# EAGLE board m7103_ (EAGLE 4.11)
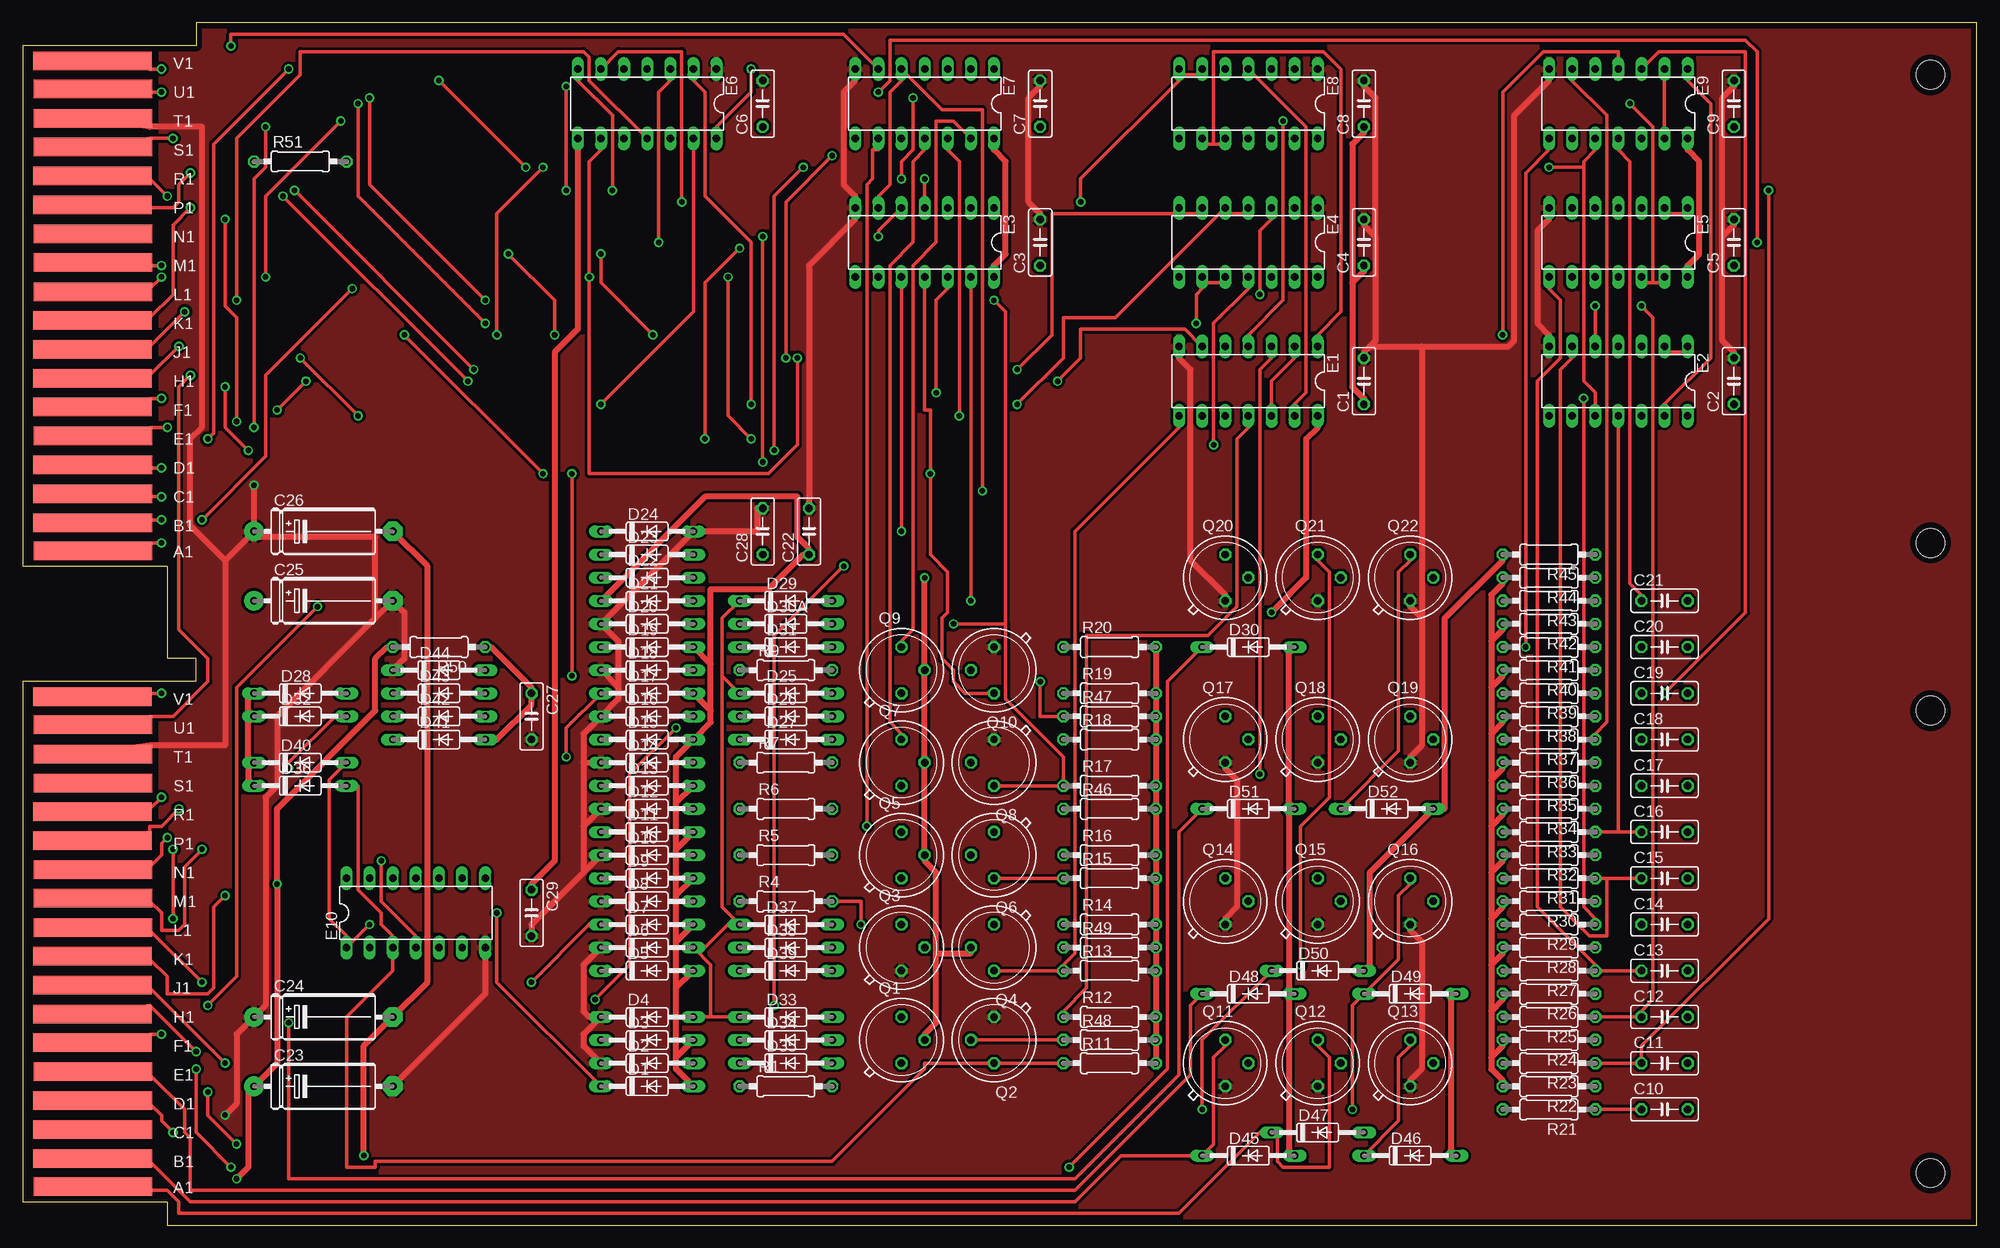
[diagram p0: board, top side]
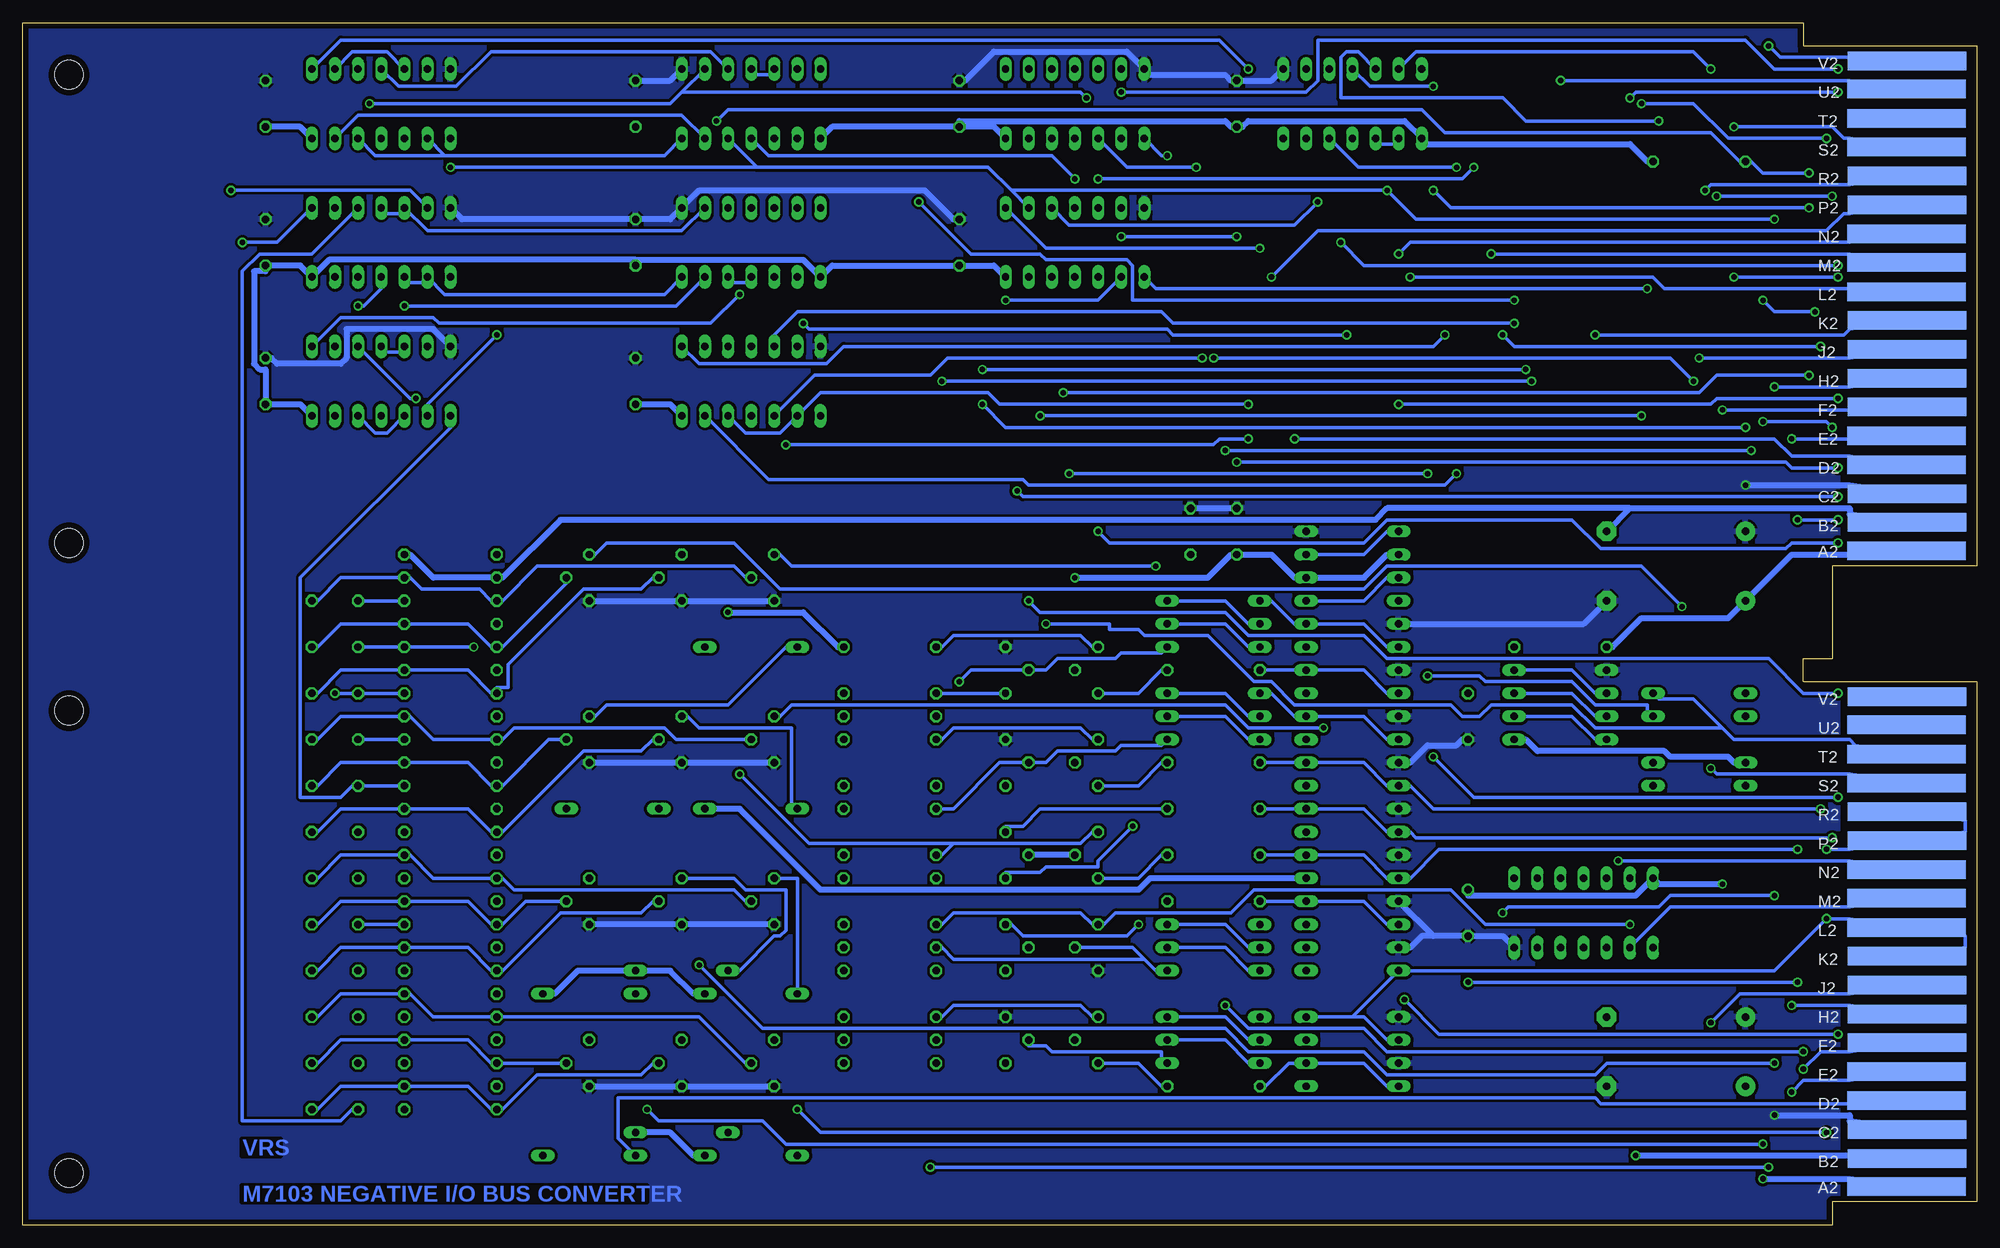
[diagram p1: board, bottom side, seen from below]

Size 214.63 x 132.08 mm. Coordinates in mm from the lower left corner, seen from the top.
Copper layers (1*16): Top 0.035mm / dielectric 1.5mm / Bottom 0.035mm
Design rules "15mils": minimum track width 15mil, minimum drill 24mil, track to track 12mil, track to pad 10mil, pad to pad 10mil, via to via 10mil, smd to smd 10mil, copper to edge 25mil, drill to drill 10mil, minimum pad ring 10mil, minimum via ring 8mil, stop-mask expansion 0mil, vias tented up to drill 0mil, thermal gap 10mil
Net classes: 1 Supply: width 0.635 mm

## Footprints (pad centres in the part's own frame; a part is rotated, then mirrored left to right if it is on the bottom)
C050-025X075 = drill 0.813 octagon: 1 -2.54,0; 2 2.54,0
E15-5 = drill 0.813 pad 2.159 round: + -7.62,0 | drill 0.813 pad 2.159 octagon: - 7.62,0
DO35-10 = drill 0.813 long: A 5.08,0; C -5.08,0
DIL14 = drill 0.813 long: 1 -7.62,-3.81; 2 -5.08,-3.81; 3 -2.54,-3.81; 4 0,-3.81; 5 2.54,-3.81; 6 5.08,-3.81; 7 7.62,-3.81; 8 7.62,3.81; 9 5.08,3.81; 10 2.54,3.81; 11 0,3.81; 12 -2.54,3.81; 13 -5.08,3.81; 14 -7.62,3.81
EDGE-CON4 = smd 13.017 x 2.032: AA1 7.709,4.207; AB1 7.684,7.312; AC1 7.684,10.474; AD1 7.684,13.665; AE1 7.693,16.84; AF1 7.668,20.041; AH1 7.668,23.19; AJ1 7.668,26.34; AK1 7.668,29.515; AL1 7.693,32.69; AM1 7.693,35.89; AN1 7.693,39.04; AP1 7.668,42.24; AR1 7.668,45.39; AS1 7.693,48.565; AT1 7.693,51.74; AU1 7.693,54.94; AV1 7.668,58.026; BA1 7.709,74.057; BB1 7.684,77.162; BC1 7.684,80.324; BD1 7.684,83.515; BE1 7.693,86.69; BF1 7.668,89.891; BH1 7.668,93.04; BJ1 7.668,96.19; BK1 7.668,99.365; BL1 7.693,102.54; BM1 7.693,105.74; BN1 7.693,108.89; BP1 7.668,112.09; BR1 7.668,115.24; BS1 7.693,118.415; BT1 7.693,121.59; BU1 7.693,124.79; BV1 7.668,127.876 | smd 13.017 x 2.032 bottom: AA2 7.69,4.207; AB2 7.668,7.328; AC2 7.668,10.49; AD2 7.693,13.665; AE2 7.693,16.84; AF2 7.642,20.041; AH2 7.642,23.19; AJ2 7.668,26.34; AK2 7.668,29.515; AL2 7.693,32.69; AM2 7.693,35.89; AN2 7.693,39.04; AP2 7.668,42.24; AR2 7.668,45.39; AS2 7.693,48.565; AT2 7.693,51.74; AU2 7.693,54.966; AV2 7.668,58.026; BA2 7.69,74.057; BB2 7.668,77.178; BC2 7.668,80.34; BD2 7.693,83.515; BE2 7.693,86.69; BF2 7.642,89.891; BH2 7.642,93.04; BJ2 7.668,96.19; BK2 7.668,99.365; BL2 7.693,102.54; BM2 7.693,105.74; BN2 7.693,108.89; BP2 7.668,112.09; BR2 7.668,115.24; BS2 7.693,118.415; BT2 7.693,121.59; BU2 7.693,124.816; BV2 7.668,127.876
TO39 = drill 0.813 octagon: 1 0,-2.54; 2 2.54,0; 3 0,2.54
0207/10 = drill 0.813 octagon: 1 -5.08,0; 2 5.08,0
DOUBLE-LONG = hole 3.175: 209.55,56.515; 209.55,5.715; 209.55,74.93; 209.55,126.365

## Placement (x,y rotation side)
C1  .01uf  [C050-025X075]  147.32,92.71 90 top
C2  .01uf  [C050-025X075]  187.96,92.71 90 top
C3  .01uf  [C050-025X075]  111.76,107.95 90 top
C4  .01uf  [C050-025X075]  147.32,107.95 90 top
C5  .01uf  [C050-025X075]  187.96,107.95 90 top
C6  .01uf  [C050-025X075]  81.28,123.19 90 top
C7  .01uf  [C050-025X075]  111.76,123.19 90 top
C8  .01uf  [C050-025X075]  147.32,123.19 90 top
C9  .01uf  [C050-025X075]  187.96,123.19 90 top
C10  15pf  [C050-025X075]  180.34,12.7 0 top
C11  15pf  [C050-025X075]  180.34,17.78 0 top
C12  15pf  [C050-025X075]  180.34,22.86 0 top
C13  15pf  [C050-025X075]  180.34,27.94 0 top
C14  15pf  [C050-025X075]  180.34,33.02 0 top
C15  15pf  [C050-025X075]  180.34,38.1 0 top
C16  15pf  [C050-025X075]  180.34,43.18 0 top
C17  15pf  [C050-025X075]  180.34,48.26 0 top
C18  15pf  [C050-025X075]  180.34,53.34 0 top
C19  15pf  [C050-025X075]  180.34,58.42 0 top
C20  15pf  [C050-025X075]  180.34,63.5 0 top
C21  15pf  [C050-025X075]  180.34,68.58 0 top
C22  .01uf  [C050-025X075]  86.36,76.2 90 top
C23  6.8uf  [E15-5]  33.02,15.24 0 top
C24  6.8uf  [E15-5]  33.02,22.86 0 top
C25  6.8uf  [E15-5]  33.02,68.58 0 top
C26  6.8uf  [E15-5]  33.02,76.2 0 top
C27  .01uf  [C050-025X075]  55.88,55.88 270 top
C28  .01uf  [C050-025X075]  81.28,76.2 90 top
C29  .01uf  [C050-025X075]  55.88,34.29 270 top
D1  D664  [DO35-10]  68.58,15.24 0 top
D2  D664  [DO35-10]  68.58,17.78 0 top
D3  D664  [DO35-10]  68.58,20.32 0 top
D4  D664  [DO35-10]  68.58,22.86 0 top
D5  D664  [DO35-10]  68.58,27.94 0 top
D6  D664  [DO35-10]  68.58,30.48 0 top
D7  D664  [DO35-10]  68.58,33.02 0 top
D8  D664  [DO35-10]  68.58,35.56 0 top
D9  D664  [DO35-10]  68.58,38.1 0 top
D10  D664  [DO35-10]  68.58,40.64 0 top
D11  D664  [DO35-10]  68.58,43.18 0 top
D12  D664  [DO35-10]  68.58,45.72 0 top
D13  D664  [DO35-10]  68.58,48.26 0 top
D14  D664  [DO35-10]  68.58,50.8 0 top
D15  D664  [DO35-10]  68.58,53.34 0 top
D16  D664  [DO35-10]  68.58,55.88 0 top
D17  D664  [DO35-10]  68.58,58.42 0 top
D18  D664  [DO35-10]  68.58,60.96 0 top
D19  D664  [DO35-10]  68.58,63.5 0 top
D20  D664  [DO35-10]  68.58,66.04 0 top
D21  D662  [DO35-10]  68.58,68.58 0 top
D22  D662  [DO35-10]  68.58,71.12 0 top
D23  D662  [DO35-10]  68.58,73.66 0 top
D24  D662  [DO35-10]  68.58,76.2 0 top
D25  D664  [DO35-10]  83.82,58.42 0 top
D26  D664  [DO35-10]  83.82,55.88 0 top
D27  D664  [DO35-10]  83.82,53.34 0 top
D28  D664  [DO35-10]  30.48,58.42 0 top
D29  D664  [DO35-10]  83.82,68.58 0 top
D30  D664  [DO35-10]  134.62,63.5 0 top
D30A  D664  [DO35-10]  83.82,66.04 0 top
D31  D664  [DO35-10]  83.82,63.5 0 top
D32  D664  [DO35-10]  30.48,55.88 0 top
D33  D664  [DO35-10]  83.82,22.86 0 top
D34  D664  [DO35-10]  83.82,20.32 0 top
D35  D664  [DO35-10]  83.82,17.78 0 top
D36  D664  [DO35-10]  30.48,48.26 0 top
D37  D664  [DO35-10]  83.82,33.02 0 top
D38  D664  [DO35-10]  83.82,30.48 0 top
D39  D664  [DO35-10]  83.82,27.94 0 top
D40  D664  [DO35-10]  30.48,50.8 0 top
D41  D662  [DO35-10]  45.72,53.34 0 top
D42  D662  [DO35-10]  45.72,55.88 0 top
D43  D662  [DO35-10]  45.72,58.42 0 top
D44  D662  [DO35-10]  45.72,60.96 0 top
D45  D664  [DO35-10]  134.62,7.62 0 top
D46  D664  [DO35-10]  152.4,7.62 0 top
D47  D664  [DO35-10]  142.24,10.16 0 top
D48  D664  [DO35-10]  134.62,25.4 0 top
D49  D664  [DO35-10]  152.4,25.4 0 top
D50  D664  [DO35-10]  142.24,27.94 0 top
D51  D664  [DO35-10]  134.62,45.72 0 top
D52  D664  [DO35-10]  149.86,45.72 0 top
E1  DS8881N  [DIL14]  134.62,92.71 180 top
E2  7400N  [DIL14]  175.26,92.71 180 top
E3  74H04N  [DIL14]  99.06,107.95 180 top
E4  SP380N  [DIL14]  134.62,107.95 180 top
E5  7400N  [DIL14]  175.26,107.95 180 top
E6  SP380N  [DIL14]  68.58,123.19 180 top
E7  7416N  [DIL14]  99.06,123.19 180 top
E8  SP380N  [DIL14]  134.62,123.19 180 top
E9  7400N  [DIL14]  175.26,123.19 180 top
E10  74H04N  [DIL14]  43.18,34.29 0 top
EDGE  [EDGE-CON4]  0,0 0 top
Q1  2N3009B  [TO39]  96.52,20.32 0 top
Q2  2N3009B  [TO39]  106.68,20.32 180 top
Q3  2N3009B  [TO39]  96.52,30.48 0 top
Q4  2N3009B  [TO39]  106.68,30.48 180 top
Q5  2N3009B  [TO39]  96.52,40.64 0 top
Q6  2N3009B  [TO39]  106.68,40.64 180 top
Q7  2N3009B  [TO39]  96.52,50.8 0 top
Q8  2N3009B  [TO39]  106.68,50.8 180 top
Q9  2N3009B  [TO39]  96.52,60.96 0 top
Q10  2N3009B  [TO39]  106.68,60.96 180 top
Q11  2N3639B  [TO39]  132.08,17.78 0 top
Q12  2N3639B  [TO39]  142.24,17.78 0 top
Q13  2N3639B  [TO39]  152.4,17.78 0 top
Q14  2N3639B  [TO39]  132.08,35.56 0 top
Q15  2N3639B  [TO39]  142.24,35.56 0 top
Q16  2N3639B  [TO39]  152.4,35.56 0 top
Q17  2N3639B  [TO39]  132.08,53.34 0 top
Q18  2N3639B  [TO39]  142.24,53.34 0 top
Q19  2N3639B  [TO39]  152.4,53.34 0 top
Q20  2N3639B  [TO39]  132.08,71.12 0 top
Q21  2N3639B  [TO39]  142.24,71.12 0 top
Q22  2N3639B  [TO39]  152.4,71.12 0 top
R1  470  [0207/10]  83.82,15.24 0 top
R4  470  [0207/10]  83.82,35.56 0 top
R5  470  [0207/10]  83.82,40.64 0 top
R6  470  [0207/10]  83.82,45.72 0 top
R7  470  [0207/10]  83.82,50.8 0 top
R9  470  [0207/10]  83.82,60.96 0 top
R11  470  [0207/10]  119.38,17.78 0 top
R12  4.7K  [0207/10]  119.38,22.86 0 top
R13  4.7K  [0207/10]  119.38,27.94 0 top
R14  470  [0207/10]  119.38,33.02 0 top
R15  4.7K  [0207/10]  119.38,38.1 0 top
R16  4.7K  [0207/10]  119.38,40.64 0 top
R17  470  [0207/10]  119.38,48.26 0 top
R18  4.7K  [0207/10]  119.38,53.34 0 top
R19  470  [0207/10]  119.38,58.42 0 top
R20  4.7K  [0207/10]  119.38,63.5 0 top
R21  1K  [0207/10]  167.64,12.7 180 top
R22  5.6K  [0207/10]  167.64,15.24 180 top
R23  1K  [0207/10]  167.64,17.78 180 top
R24  5.6K  [0207/10]  167.64,20.32 180 top
R25  1K  [0207/10]  167.64,22.86 180 top
R26  5.6K  [0207/10]  167.64,25.4 180 top
R27  1K  [0207/10]  167.64,27.94 180 top
R28  5.6K  [0207/10]  167.64,30.48 180 top
R29  1K  [0207/10]  167.64,33.02 180 top
R30  5.6K  [0207/10]  167.64,35.56 180 top
R31  1K  [0207/10]  167.64,38.1 180 top
R32  5.6K  [0207/10]  167.64,40.64 180 top
R33  1K  [0207/10]  167.64,43.18 180 top
R34  5.6K  [0207/10]  167.64,45.72 180 top
R35  1K  [0207/10]  167.64,48.26 180 top
R36  5.6K  [0207/10]  167.64,50.8 180 top
R37  1K  [0207/10]  167.64,53.34 180 top
R38  5.6K  [0207/10]  167.64,55.88 180 top
R39  1K  [0207/10]  167.64,58.42 180 top
R40  5.6K  [0207/10]  167.64,60.96 180 top
R41  1K  [0207/10]  167.64,63.5 180 top
R42  5.6K  [0207/10]  167.64,66.04 180 top
R43  1K  [0207/10]  167.64,68.58 180 top
R44  5.6K  [0207/10]  167.64,71.12 180 top
R45  1K  [0207/10]  167.64,73.66 180 top
R46  4.7K  [0207/10]  119.38,45.72 0 top
R47  4.7K  [0207/10]  119.38,55.88 0 top
R48  4.7K  [0207/10]  119.38,20.32 0 top
R49  4.7K  [0207/10]  119.38,30.48 0 top
R50  220  [0207/10]  45.72,63.5 180 top
R51  3.3K  [0207/10]  30.48,116.84 0 top
U$3  OUTLINE-DOUBLE-LONG  [DOUBLE-LONG]  0,0 0 top

## Library data of the parts
C1-C29 R1 R4-R7 R9 R11-R51 = rcl
D1-D30 D30A D31-D52 = diode
E1 E4 E6 E8 EDGE U$3 = dec-con
E2 E3 E5 E7 E9 E10 = 74xx-jameco
Q1-Q10 = transistor-npn
Q11-Q22 = transistor-pnp

## Nets
+3V [Supply]: C27.1 D28.C D32.C D36.C D40.C D41.A R50.1
-1.5V [Supply]: C28.1 D22.A D23.C Q1.2 Q4.2 Q5.2 Q6.2 Q7.2 Q9.2
-3V [Supply]: C22.1 D1.A D3.A D5.A D7.A D9.A D11.A D13.A D15.A D17.A D19.A D21.C D30.A D45.A D46.A D47.A D48.A D49.A D50.A D51.A D52.A R45.2
-15V [Supply]: C24.- C26.- EDGE.AB2 EDGE.BB2 R22.2 R24.2 R26.2 R28.2 R30.2 R32.2 R34.2 R36.2 R38.2 R40.2 R42.2 R44.2 R45.1
AK1: D1.C D2.A EDGE.AK1 R1.1
AL1: D7.C D8.A EDGE.AL1 R4.1
AM1: D9.C D10.A EDGE.AM1 R5.1
AN1: D11.C D12.A EDGE.AN1 R6.1
AP1: D13.C D14.A EDGE.AP1 R7.1
AR1: D17.C D18.A EDGE.AR1 R9.1
BAC2D: E1.2 E1.9 E1.12 E6.2
BD2: E3.1 EDGE.BD2
BE2: E3.3 E6.6 EDGE.BE2
D2AC: E8.13 E9.2 E9.5 E9.13
D2DATA: E2.10 E2.12 E3.2 E6.7 E8.12 E9.10 EDGE.BE1
GND [Supply]: C1.2 C2.2 C3.2 C4.2 C5.2 C6.2 C7.2 C8.2 C9.2 C22.2 C23.- C24.+ C25.- C26.+ C27.2 C28.2 C29.2 D2.C D4.C D6.C D8.C D10.C D12.C D14.C D16.C D18.C D20.C D24.A D44.C E1.7 E2.7 E3.7 E4.1 E5.7 E6.1 E7.7 E8.1 E9.7 E10.7 EDGE.AC2 EDGE.AT1 EDGE.BC2 EDGE.BT1 Q2.1 Q3.1 Q8.1 Q10.1 Q11.1 Q12.1 Q13.1 Q14.1 Q15.1 Q16.1 Q17.1 Q18.1 Q19.1 Q20.1 Q21.1 Q22.1
N$1: Q4.1 R4.2
N$2: E1.8 Q4.3 R13.1
N$3: Q1.1 R1.2
N$4: Q5.1 R5.2
N$5: E1.11 Q1.3 R12.1
N$6: E1.3 Q5.3 R16.1
N$7: Q6.1 R6.2
N$8: E7.9 Q6.3 R15.1
N$9: Q7.1 R7.2
N$10: E7.11 Q7.3 R18.1
N$11: Q9.1 R9.2
N$12: E7.13 Q9.3 R20.1
N$13: E3.4 E8.11
N$14: D3.C D4.A D5.C D6.A D15.C D16.A D19.C D20.A D25.C D29.C D33.C D37.C EDGE.AK2 EDGE.AL2 EDGE.AP2 EDGE.AR2
N$15: E1.1 E8.9 E8.10 EDGE.BM2
N$16: E1.10 E6.9 E6.10 EDGE.BL2
N$17: E1.13 E8.4 E8.5 EDGE.BK2
N$18: E7.12 EDGE.BJ2
N$19: E7.10 EDGE.BH2
N$20: E7.8 EDGE.BF2
N$21: E2.9 E8.3 E9.4
N$22: E2.13 E6.14 E9.1
N$23: E8.14 E9.9 E9.12
N$24: D27.A Q8.2 R46.1
N$25: D25.A D26.C
N$26: C18.1 E9.6 R37.1
N$27: C18.2 Q17.2 R37.2 R38.1
N$28: EDGE.AF1 Q17.3
N$29: C17.1 E2.8 R35.1
N$30: C17.2 Q19.2 R35.2 R36.1
N$31: D30.C EDGE.AF2 Q19.3
N$32: C12.1 E5.11 R25.1
N$33: C12.2 Q11.2 R25.2 R26.1
N$34: D45.C EDGE.AB1 Q11.3
N$35: C13.1 E5.8 R27.1
N$36: C13.2 Q15.2 R27.2 R28.1
N$37: D50.C EDGE.AD1 Q15.3
N$38: E5.12 E5.13 E8.2 EDGE.BU2
N$39: E4.14 E5.9 E5.10
N$40: E8.6 E8.7 EDGE.BU1
N$41: E4.9 E4.10 EDGE.BN2
N$42: C19.1 E9.3 R39.1
N$43: C19.2 Q21.2 R39.2 R40.1
N$44: EDGE.AJ1 Q21.3
N$45: C16.1 E2.11 R33.1
N$46: C16.2 Q18.2 R33.2 R34.1
N$47: D51.C EDGE.AJ2 Q18.3
N$48: C21.1 E9.11 R43.1
N$49: C21.2 Q20.2 R43.2 R44.1
N$50: EDGE.AH1 Q20.3
N$51: C20.1 E9.8 R41.1
N$52: C20.2 Q22.2 R41.2 R42.1
N$53: D52.C EDGE.AH2 Q22.3
N$54: C15.1 E2.6 R31.1
N$55: C15.2 Q14.2 R31.2 R32.1
N$56: D48.C EDGE.AE1 Q14.3
N$57: C11.1 E5.6 R23.1
N$58: C11.2 Q13.2 R23.2 R24.1
N$59: D46.C EDGE.AD2 Q13.3
N$60: C14.1 E2.3 R29.1
N$61: C14.2 Q16.2 R29.2 R30.1
N$62: D49.C EDGE.AE2 Q16.3
N$63: C10.1 E5.3 R21.1
N$64: C10.2 Q12.2 R21.2 R22.1
N$65: D47.C EDGE.AA1 Q12.3
N$66: E2.4 E2.5 E4.13
N$67: E4.2 E5.4 E5.5
N$68: E5.1 E5.2 EDGE.BV1
N$69: E2.1 E2.2 E4.3
N$70: E4.4 E4.5 EDGE.BS2
N$71: E4.6 E4.7 EDGE.BR2
N$72: E4.11 E4.12 EDGE.BP2
N$73: D26.A D27.C
N$74: D28.A E3.9 EDGE.AT2 Q8.3 R17.1
N$75: D31.A Q10.2 R47.1
N$76: D29.A D30A.C
N$77: D30A.A D31.C
N$78: D32.A E3.11 EDGE.AS2 Q10.3 R19.1
N$79: D35.A Q2.2 R48.1
N$80: D33.A D34.C
N$81: D34.A D35.C
N$82: D36.A E10.3 Q2.3 R11.1
N$83: D39.A Q3.2 R49.1
N$84: D37.A D38.C
N$85: D38.A D39.C
N$86: D40.A E10.1 Q3.3 R14.1
N$87: E10.4 EDGE.AN2
N$88: E3.8 EDGE.BB1
N$89: E3.10 EDGE.BA1
N$90: E10.2 EDGE.AM2
N$91: E6.5 EDGE.BL1
N$92: E6.4 EDGE.BK1
N$93: E6.3 EDGE.BM1
N$94: E6.13 EDGE.BF1
N$95: E6.12 EDGE.BH1
N$96: E6.11 EDGE.BJ1
N$97: E1.5 EDGE.BS1
N$98: E1.6 EDGE.BR1
N$99: E1.4 EDGE.BP1 R51.1
N$100: E3.6 E7.5 EDGE.BC1
N$101: E3.5 EDGE.BD1
N$102: E3.13 EDGE.AV1
N$103: E3.12 EDGE.AU1
N$104: E7.6 EDGE.BV2
N$105: D23.A D24.C
N$107: D41.C D42.A
N$108: D42.C D43.A
N$109: D43.C D44.A
N$110: D21.A D22.C
VCC [Supply]: C1.1 C2.1 C3.1 C4.1 C5.1 C6.1 C7.1 C8.1 C9.1 C23.+ C25.+ C29.1 E1.14 E2.14 E3.14 E4.8 E5.14 E6.8 E7.14 E8.8 E9.14 E10.14 EDGE.AA2 EDGE.BA2 R11.2 R12.2 R13.2 R14.2 R15.2 R16.2 R17.2 R18.2 R19.2 R20.2 R46.2 R47.2 R48.2 R49.2 R50.2 R51.2

## Tracks (layer width: path | path; a pad name or v marks a point on that pad's centre or on a via)
+3V
  Top 0.635: D36.C 24.77,48.9 24.77,50.16 D40.C 24.77,51.44 24.77,55.24 D32.C 24.77,56.52 24.77,57.78 D28.C | D41.A 52.07,53.34 55.88,57.15 C27.1 55.88,59.05 51.44,63.5 R50.1
  Bottom 0.635: D40.C 26.67,50.8 27.31,51.44 33.66,51.44 34.29,52.07 48.26,52.07 49.53,53.34 D41.A
-1.5V  (via drill 0.61)
  Top 0.635: 100.33,29.84 100.33,22.23 99.06,20.95 Q1.2 | 100.33,29.84 100.33,38.73 99.06,40.01 Q5.2 Q7.2 Q9.2 v99.06,71.12 | 100.33,29.84 104.14,29.84 Q4.2
  Bottom 0.635: D23.C 64.77,73.66 67.31,71.12 D22.A 74.93,71.12 77.47,73.66 C28.1 81.92,73.66 84.46,71.12 v99.06,71.12 | Q5.2 Q6.2
-3V
  Top 0.635: D21.C 74.93,80.01 85.09,80.01 85.09,75.56 86.36,74.3 C22.1 85.73,73.66 81.92,69.85 75.57,69.85 75.57,61.59 | 71.76,18.41 71.76,17.14 D1.A | 71.76,18.41 D3.A | 71.76,18.41 71.76,26.04 | 71.76,26.04 D5.A | 71.76,26.04 71.76,31.11 | 71.76,31.11 D7.A | 71.76,31.11 71.76,36.2 | 71.76,36.2 D9.A | 71.76,36.2 71.76,41.27 | 71.76,41.27 D11.A | 71.76,41.27 71.76,46.35 | 71.76,46.35 D13.A | 71.76,46.35 71.76,51.44 D15.A 75.57,55.24 75.57,56.52 | 75.57,56.52 D17.A | 75.57,56.52 75.57,61.59 | 75.57,61.59 D19.A | D46.A 156.85,8.26 156.85,24.77 D49.A | D30.A 139.07,62.87 139.07,46.35 D51.A 139.07,45.09 139.07,26.04 D48.A 139.07,24.77 139.07,8.26 D45.A | D50.A 147.96,28.57 147.96,38.73 D52.A 156.21,45.72 156.21,66.67 162.56,73.03 R45.2
  Bottom 0.635: D45.A 140.97,7.62 143.51,10.16 D47.A | D48.A 140.97,25.4 143.51,27.94 D50.A 153.67,27.94 156.21,25.4 D49.A | D9.A 90.81,38.1 92.08,36.83 127,36.83 135.89,45.72 D51.A
-15V  (via drill 0.61)
  Top 0.635: 161.29,18.41 161.29,17.14 162.56,15.88 R22.2 | 161.29,18.41 162.56,19.68 R24.2 | 161.29,23.5 162.56,24.77 R26.2 | 161.29,23.5 161.29,18.41 | 161.29,28.57 162.56,29.84 R28.2 | 161.29,28.57 161.29,23.5 | 161.29,33.66 162.56,34.92 R30.2 | 161.29,33.66 161.29,28.57 | 161.29,38.73 162.56,40.01 R32.2 | 161.29,38.73 161.29,33.66 | 161.29,43.81 162.56,45.09 R34.2 | 161.29,43.81 161.29,38.73 | 161.29,48.9 162.56,50.16 R36.2 | 161.29,48.9 161.29,43.81 | 161.29,53.98 162.56,55.24 R38.2 | 161.29,53.98 161.29,48.9 | 161.29,59.05 162.56,60.33 R40.2 | 161.29,59.05 161.29,53.98 | 161.29,64.14 162.56,65.41 R42.2 | 161.29,64.14 161.29,59.05 | 161.29,64.14 161.29,69.22 162.56,70.48 R44.2 | C26.- 44.45,72.39 44.45,26.67 C24.- 37.47,19.68 v37.47,7.62
  Bottom 0.635: R45.1 172.09,73.66 169.55,71.12 R44.2 161.93,71.12 155.58,77.47 66.04,77.47 64.77,78.74 38.1,78.74 | v37.47,7.62 13.97,7.62 EDGE.AB2 | 38.1,78.74 13.97,78.74 13.97,78.11 EDGE.BB2 | C26.- 38.1,78.74
AK1  (via drill 0.61)
  Top 0.381: v52.07,34.29 52.07,26.67 D1.C | v22.23,36.2 20.96,34.92 20.96,26.04 20.32,25.4 15.88,25.4 15.88,27.3 13.97,29.21 EDGE.AK1
  Bottom 0.381: D1.C 64.77,15.24 67.31,17.78 D2.A 75.57,17.78 78.11,15.24 R1.1 | v52.07,34.29 51.44,34.92 34.93,34.92 33.66,36.2 v22.23,36.2
AL1  (via drill 0.61)
  Top 0.381: v55.88,26.67 62.23,33.02 D7.C | v19.69,26.67 13.97,32.38 EDGE.AL1
  Bottom 0.381: D7.C 64.77,33.02 67.31,35.56 D8.A R4.1 | v19.69,26.67 v55.88,26.67
AM1  (via drill 0.61)
  Top 0.381: v19.69,41.27 17.78,39.37 17.78,33.02 17.15,32.38 15.24,32.38 15.24,34.29 13.97,35.56 EDGE.AM1
  Bottom 0.381: R5.1 D10.A 67.31,40.64 64.77,38.1 D9.C 62.23,38.1 59.06,41.27 v19.69,41.27
AN1  (via drill 0.61)
  Top 0.381: v15.88,42.55 15.24,41.91 15.24,40.64 13.97,39.37 EDGE.AN1
  Bottom 0.381: R6.1 D12.A 67.31,45.72 64.77,43.18 D11.C 62.23,43.18 61.6,42.55 v15.88,42.55
AP1  (via drill 0.61)
  Top 0.381: v17.15,45.72 15.24,43.81 13.97,43.81 13.97,43.18 EDGE.AP1
  Bottom 0.381: R7.1 D14.A 67.31,50.8 64.77,48.26 D13.C 62.23,48.26 59.69,45.72 v17.15,45.72
AR1  (via drill 0.61)
  Top 0.381: v59.69,51.44 59.69,54.61 D17.C | v15.24,46.99 13.97,45.72 EDGE.AR1
  Bottom 0.381: D17.C 64.77,58.42 67.31,60.96 D18.A R9.1 | v59.69,51.44 55.25,46.99 v15.24,46.99
BAC2D  (via drill 0.61)
  Top 0.381: v80.01,90.17 80.01,107.95 74.93,113.03 74.93,124.46 73.66,125.73 E6.2 | E1.2 139.7,95.25 137.16,92.71 E1.12
  Bottom 0.381: E1.12 135.26,87 131.45,87 E1.9 127,91.44 108.59,91.44 107.32,90.17 v80.01,90.17
BD2  (via drill 0.61)
  Top 0.381: v78.74,107.31 74.93,103.5 v74.93,86.36
  Bottom 0.381: v78.74,107.31 102.24,107.31 E3.1 | v74.93,86.36 22.23,86.36 20.32,84.45 13.97,84.45 EDGE.BD2
BE2  (via drill 0.61)
  Top 0.381: v72.39,112.39 72.39,128.91 65.41,128.91 E6.6 | v20.32,86.36 20.96,87 20.96,118.75 v29.21,127
  Bottom 0.381: v72.39,112.39 74.93,109.86 99.7,109.86 E3.3 | v20.32,86.36 13.97,86.36 EDGE.BE2 | v29.21,127 31.12,128.91 61.6,128.91 E6.6
D2AC
  Top 0.381: E9.13 E9.2
  Bottom 0.381: E9.5 174.63,128.91 178.44,128.91 E9.2 | E8.13 142.24,121.92 177.8,121.92 E9.13
D2DATA  (via drill 0.61)
  Top 0.381: 171.45,116.2 171.45,92.71 172.72,91.44 E2.10 | 171.45,116.2 171.45,116.84 172.72,118.11 E9.10 | v64.77,113.67 64.77,121.92 60.96,125.73 E6.7 | v15.88,87.63 13.97,87.63 EDGE.BE1 | v23.5,88.27 23.5,99.69 22.23,100.97 v22.23,110.49 | v167.64,116.2 171.45,116.2
  Bottom 0.381: E2.10 174.63,87 175.9,87 E2.12 | 106.05,113.67 108.59,116.2 133.99,116.2 | 106.05,113.67 E3.2 | E8.12 133.99,116.2 | 106.05,113.67 v64.77,113.67 61.6,110.49 v22.23,110.49 | v15.88,87.63 16.51,88.27 v23.5,88.27 | 133.99,116.2 v167.64,116.2
GND  (via drill 0.61)
  Top 0.635: 186.69,108.58 186.69,97.16 187.96,95.89 C2.2 | 186.69,108.58 187.96,109.86 C5.2 | 186.69,108.58 186.69,123.83 187.96,125.09 C9.2 | E2.7 167.64,97.79 166.37,99.06 166.37,109.22 167.64,110.49 E5.7 | 147.96,96.52 148.59,97.16 148.59,108.58 | 147.96,96.52 147.32,95.89 C1.2 | 148.59,108.58 147.32,109.86 C4.2 | 147.96,96.52 153.67,96.52 | 153.67,96.52 163.2,96.52 163.83,97.16 163.83,121.92 167.64,125.73 E9.7 | 148.59,108.58 148.59,123.83 147.32,125.09 C8.2 | E1.7 127,95.25 128.27,93.98 128.27,73.03 132.08,69.22 Q20.1 | 153.67,66.67 153.67,52.7 152.4,51.44 Q19.1 | 153.67,66.67 152.4,67.94 Q22.1 | Q16.1 152.4,32.38 153.67,31.11 153.67,17.14 152.4,15.88 Q13.1 | Q17.1 132.08,50.16 133.35,48.9 133.35,34.92 132.08,33.66 Q14.1 | 153.67,96.52 153.67,66.67 | D44.C 41.91,62.23 41.91,67.31 C25.- 38.74,66.67 | 38.74,66.67 27.94,55.88 27.94,48.26 26.67,46.99 26.67,24.13 C24.+ 23.5,20.95 23.5,13.34 v22.23,12.06 | 38.74,66.67 38.74,75.56 26.04,75.56 C26.+ | 22.23,73.03 22.23,52.7 13.97,52.7 EDGE.AT1 | C26.+ 22.23,73.03 | C26.+ v25.4,81.28 | 22.23,73.03 18.42,76.83 18.42,86.36 19.69,87.63 19.69,120.65 13.97,120.65 EDGE.BT1 | C3.2 111.76,111.12 110.49,112.39 110.49,123.83 111.76,125.09 C7.2 | E7.7 91.44,125.73 90.17,124.46 90.17,114.3 91.44,113.03 E3.7 91.44,110.49 86.36,105.41 C22.2 | C28.2 80.65,78.74 80.65,76.2 D24.A D20.C 65.41,64.14 65.41,59.05 | D2.C 61.6,19.68 61.6,20.95 D4.C 62.23,22.86 61.6,23.5 61.6,28.57 D6.C | 61.6,38.73 55.88,33.02 C29.2 | 61.6,38.73 D10.C | 61.6,43.81 61.6,38.73 | 61.6,43.81 D12.C | 61.6,50.8 61.6,43.81 | 61.6,50.8 61.6,53.98 D16.C 65.41,57.78 65.41,59.05 | 65.41,59.05 D18.C
  Top 0.635: C23.- 50.8,25.4 E10.7 | 61.6,50.8 D14.C
  Bottom 0.635: E8.1 143.51,125.73 C8.2 | E5.7 166.37,110.49 C4.2 143.51,110.49 E4.1 140.34,113.67 115.57,113.67 112.4,110.49 C3.2 | C2.2 187.33,95.25 186.69,94.61 179.71,94.61 179.07,95.25 179.07,98.42 169.55,98.42 E2.7 | Q17.1 Q18.1 Q19.1 | Q20.1 Q21.1 Q22.1 | Q14.1 Q15.1 Q16.1 | Q11.1 Q12.1 Q13.1 | v22.23,12.06 13.97,12.06 13.97,11.43 EDGE.AC2 | v25.4,81.28 13.97,81.28 EDGE.BC2 | E6.1 77.47,125.73 C6.2 81.92,125.73 82.55,126.36 90.81,126.36 E7.7 93.35,128.91 107.95,128.91 111.13,125.73 C7.2 | C22.2 C28.2 | C27.2 56.52,53.34 57.15,52.7 60.33,52.7 62.23,50.8 D14.C | E10.7 52.07,31.75 C29.2 59.69,31.75 | 59.69,31.75 60.96,31.75 62.23,30.48 D6.C | 59.69,31.75 D8.C | C25.- 43.18,66.04 D20.C
  pour Bottom (isolate 0.305): 15.24,0 15.24,132.08 214.63,132.08 214.63,0
  pour Top (isolate 0.305): 15.24,0 15.24,132.08 214.63,132.08 214.63,0
N$1  (via drill 0.61)
  Top 0.381: v92.08,33.02 92.08,35.56 R4.2
  Bottom 0.381: v92.08,33.02 93.35,31.75 104.78,31.75 106.05,33.02 Q4.1
N$2
  Top 0.381: E1.8 127,87.63 115.57,76.2 115.57,29.84 114.3,28.57 R13.1 Q4.3
N$3
  Bottom 0.381: R1.2 89.54,15.24 92.08,17.78 Q1.1
N$4
  Bottom 0.381: R5.2 89.54,40.64 92.08,38.1 Q5.1
N$5
  Top 0.381: E1.11 134.62,87.63 133.35,86.36 133.35,67.94 130.18,64.77 116.84,64.77 116.84,26.04 114.3,23.5 R12.1
  Bottom 0.381: Q1.3 97.16,22.86 98.43,24.13 112.4,24.13 113.67,22.86 R12.1
N$6  (via drill 0.61)
  Top 0.381: v135.89,49.53 135.89,93.98 137.16,95.25 E1.3
  Bottom 0.381: 112.4,41.91 98.43,41.91 97.16,43.18 Q5.3 | 112.4,41.91 113.67,40.64 R16.1 | v135.89,49.53 128.27,41.91 112.4,41.91
N$7
  Bottom 0.381: R6.2 102.87,45.72 104.78,43.81 106.68,43.81 Q6.1
N$8  (via drill 0.61)
  Top 0.381: Q6.3 R15.1 | v92.71,43.81 92.71,114.3 93.35,114.94 93.35,118.11 93.98,118.11 E7.9
  Bottom 0.381: v92.71,43.81 96.52,40.01 96.52,39.37 102.24,39.37 102.87,38.73 106.68,38.73 Q6.3
N$9
  Bottom 0.381: R7.2 89.54,50.8 92.08,48.26 Q7.1
N$10
  Top 0.381: E7.11 99.06,118.11 97.79,116.84 97.79,107.95 95.25,105.41 95.25,55.24 96.52,53.98 Q7.3
  Bottom 0.381: Q7.3 97.16,53.34 98.43,54.61 112.4,54.61 113.67,53.34 R18.1
N$11
  Bottom 0.381: R9.2 89.54,60.96 92.08,58.42 Q9.1
N$12
  Top 0.381: E7.13 102.24,121.28 100.33,121.28 100.33,107.95 97.79,105.41 97.79,65.41 96.52,64.14 Q9.3
  Bottom 0.381: Q9.3 97.16,63.5 98.43,64.77 112.4,64.77 113.67,63.5 R20.1
N$13  (via drill 0.61)
  Top 0.381: v99.06,114.94 E3.4
  Bottom 0.381: v99.06,114.94 101.6,117.47 132.72,117.47 E8.11
N$14  (via drill 0.61)
  Top 0.381: v16.51,33.66 v16.51,41.27 | 75.57,22.86 D33.C | D4.A 75.57,22.86 | 75.57,22.86 75.57,28.57 D6.A 74.93,30.48 77.47,33.02 D37.C 76.84,34.92 76.84,60.33 | 76.84,60.33 76.84,66.67 D29.C | 76.84,60.33 D25.C
  Bottom 0.381: EDGE.AR2 1.27,44.45 1.27,43.18 EDGE.AP2 13.97,41.27 v16.51,41.27 | EDGE.AK2 1.27,30.48 1.27,31.75 EDGE.AL2 13.97,33.66 v16.51,33.66 22.23,27.94 D5.C 68.58,22.86 | 68.58,22.86 67.31,22.86 64.77,20.32 D3.C | 68.58,22.86 D4.A | D15.C 64.77,53.34 67.31,55.88 D16.A 74.93,55.88 77.47,58.42 D25.C | D19.C 64.77,63.5 67.31,66.04 D20.A 74.93,66.04 77.47,68.58 D29.C
N$15  (via drill 0.61)
  Top 0.381: 130.81,118.75 131.45,118.75 E8.10 | 130.81,118.75 130.18,118.75 E8.9 | 130.81,118.75 130.81,128.91 142.88,128.91 144.78,127 144.78,100.33 142.24,97.79 E1.1 | v53.34,106.68 58.42,101.6 v58.42,97.79
  Bottom 0.381: v53.34,106.68 13.97,106.68 EDGE.BM2 | v58.42,97.79 59.69,96.52 124.46,96.52 126.37,94.61 140.34,94.61 E1.1
N$16  (via drill 0.61)
  Top 0.381: v85.09,95.25 85.09,85.72 81.92,82.55 62.23,82.55 v62.23,104.14 62.23,116.84 63.5,118.11 E6.9
  Bottom 0.381: E6.9 64.14,118.75 65.41,118.75 E6.10 | v85.09,95.25 113.03,95.25 114.94,93.34 127.64,93.34 E1.10 | v62.23,104.14 35.56,104.14 34.29,102.87 13.97,102.87 EDGE.BL2
N$17  (via drill 0.61)
  Top 0.381: E1.13 139.7,90.17 140.97,91.44 140.97,120.65 E8.4 | v57.15,82.55 v41.91,97.79
  Bottom 0.381: E8.5 132.72,126.36 133.99,126.36 E8.4 | v41.91,97.79 14.61,97.79 13.97,98.42 EDGE.BK2 | v57.15,82.55 58.42,81.28 104.14,81.28 104.78,81.92 132.72,81.92 E1.13
N$18  (via drill 0.61)
  Top 0.381: v102.87,88.9 102.87,116.84 101.6,118.11 E7.12 | v30.48,95.25 v36.83,88.9
  Bottom 0.381: v36.83,88.9 v102.87,88.9 | v30.48,95.25 13.97,95.25 EDGE.BJ2
N$19  (via drill 0.61)
  Top 0.381: v85.73,116.2 82.55,113.03 v82.55,85.09 | v24.77,85.09 22.23,87.63 v22.23,92.08
  Bottom 0.381: v85.73,116.2 93.35,116.2 E7.10 | v24.77,85.09 v82.55,85.09 | v22.23,92.08 13.97,92.08 EDGE.BH2
N$20  (via drill 0.61)
  Top 0.381: v88.9,117.47 83.82,112.39 v83.82,95.25 | v27.94,89.53 v31.12,92.71
  Bottom 0.381: v88.9,117.47 89.54,117.47 E7.8 | v83.82,95.25 33.66,95.25 v31.12,92.71 | v27.94,89.53 13.97,89.53 EDGE.BF2
N$21  (via drill 0.61)
  Top 0.381: v162.56,97.79 162.56,124.46 167.01,128.91 175.26,128.91 E9.4
  Bottom 0.381: v162.56,97.79 170.18,90.17 E2.9 | E8.3 139.07,128.91 163.2,128.91 167.01,125.09 173.36,125.09 E9.4
N$22  (via drill 0.61)
  Top 0.381: E2.13 180.34,90.17 185.42,95.25 185.42,123.19 182.88,125.73 E9.1 | v80.01,127 80.01,124.46 76.2,120.65 E6.14
  Bottom 0.381: v80.01,127 83.19,130.18 179.71,130.18 E9.1
N$23
  Bottom 0.381: 168.28,117.47 144.15,117.47 E8.14 | 168.28,117.47 E9.9 | 168.28,117.47 175.9,117.47 E9.12
N$24
  Bottom 0.381: D27.A 89.54,52.7 93.98,52.7 94.62,52.07 100.97,52.07 102.24,50.8 Q8.2 107.32,50.8 112.4,45.72 R46.1
N$25
  Bottom 0.381: D26.C 80.01,55.88 82.55,58.42 D25.A
N$26
  Top 0.381: E9.6 170.18,125.73 173.99,121.92 173.99,55.24 172.72,53.98 R37.1
  Bottom 0.381: R37.1 C18.1
N$27
  Bottom 0.381: Q17.2 142.88,53.34 144.15,54.61 160.66,54.61 161.93,53.34 R37.2 169.55,53.34 172.09,55.88 R38.1 179.71,55.88 182.25,53.34 C18.2
N$28  (via drill 0.61)
  Top 0.381: v71.76,54.61 66.68,49.53 66.68,28.57 v62.87,24.77 | v15.24,20.95 13.97,20.95 EDGE.AF1
  Bottom 0.381: v71.76,54.61 80.01,54.61 82.55,57.15 130.18,57.15 131.45,55.88 Q17.3 | v62.87,24.77 59.06,20.95 v15.24,20.95
N$29
  Bottom 0.381: R35.1 C17.1 178.44,48.26 179.71,46.99 184.15,46.99 184.15,71.12 167.64,87.63 E2.8
N$30
  Bottom 0.381: Q19.2 156.85,53.34 161.93,48.26 R35.2 163.2,48.26 165.74,50.8 R36.1 179.71,50.8 182.25,48.26 C17.2
N$31  (via drill 0.61)
  Top 0.381: v114.94,6.35 125.73,17.14 125.73,59.69 D30.C | v22.86,6.35 19.05,10.16 v19.05,17.14
  Bottom 0.381: D30.C 130.81,63.5 137.16,57.15 150.5,57.15 151.77,55.88 Q19.3 | v22.86,6.35 v114.94,6.35 | v19.05,17.14 17.15,19.05 13.97,19.05 EDGE.AF2
N$32  (via drill 0.61)
  Top 0.381: R25.1 C12.1 177.8,23.5 179.07,24.77 179.07,99.69 v177.8,100.97
  Bottom 0.381: v177.8,100.97 177.17,100.97 175.26,102.87 E5.11
N$33
  Bottom 0.381: Q11.2 135.26,17.78 140.34,22.86 R25.2 169.55,22.86 172.09,25.4 R26.1 179.71,25.4 182.25,22.86 C12.2
N$34
  Top 0.381: Q11.3 132.08,19.68 130.81,18.41 130.81,8.89 D45.C 120.65,7.62 115.57,2.54 18.42,2.54 13.97,6.99 EDGE.AB1
N$35
  Top 0.381: C13.1 R27.1 172.72,28.57 166.37,34.92 166.37,92.71 168.91,95.25 168.91,101.6 167.64,102.87 E5.8
N$36
  Bottom 0.381: C13.2 182.25,27.94 179.71,30.48 R28.1 165.74,30.48 163.2,27.94 R27.2 161.93,27.94 155.58,34.29 146.69,34.29 145.42,35.56 Q15.2
N$37  (via drill 0.61)
  Top 0.381: v129.54,12.7 129.54,20.32 D50.C | v16.51,10.16 15.24,11.43 15.24,12.06 13.97,13.34 EDGE.AD1
  Bottom 0.381: D50.C 135.89,27.94 132.08,31.75 131.45,31.75 130.81,32.38 130.81,36.83 135.26,36.83 136.53,38.1 Q15.3 | v129.54,12.7 127,10.16 v16.51,10.16
N$38  (via drill 0.61)
  Top 0.381: 179.07,103.5 179.71,103.5 E5.13 | 179.07,103.5 178.44,103.5 E5.12 | v176.53,123.19 179.07,120.65 179.07,103.5 | v55.25,116.2 v45.72,125.73 | v96.52,114.94 96.52,116.84 97.79,118.11 v97.79,123.83
  Bottom 0.381: 142.24,124.46 143.51,123.19 v176.53,123.19 | 142.24,124.46 E8.2 | v45.72,125.73 13.97,125.73 EDGE.BU2 | v55.25,116.2 56.52,114.94 v96.52,114.94 | v97.79,123.83 98.43,124.46 142.24,124.46
N$39
  Bottom 0.381: E4.14 144.15,102.23 168.28,102.23 E5.9 170.82,103.5 172.09,103.5 E5.10
N$40  (via drill 0.61)
  Top 0.381: E8.6 128.91,126.36 127.64,126.36 E8.7 127,125.73 116.21,114.94 v116.21,112.39 | v50.8,101.6 38.1,114.3 v38.1,123.83 | v15.24,124.46 13.97,124.46 EDGE.BU1
  Bottom 0.381: v116.21,112.39 110.49,106.68 102.87,106.68 102.24,106.05 93.35,106.05 92.71,105.41 92.71,101.6 v50.8,101.6 | v38.1,123.83 37.47,124.46 v15.24,124.46
N$41  (via drill 0.61)
  Top 0.381: E4.10 131.45,103.5 130.18,103.5 E4.9 129.54,102.87 128.91,102.23 v128.91,99.06 | v69.22,97.79 63.5,103.5 v63.5,106.68
  Bottom 0.381: v128.91,99.06 128.27,98.42 88.9,98.42 88.27,97.79 v69.22,97.79 | v63.5,106.68 62.23,107.95 13.97,107.95 EDGE.BN2
N$42  (via drill 0.61)
  Top 0.381: v180.34,58.42 189.23,67.31 189.23,128.91 179.71,128.91 E9.3
  Bottom 0.381: R39.1 C19.1 v180.34,58.42
N$43
  Bottom 0.381: C19.2 182.25,58.42 179.71,60.96 R40.1 165.74,60.96 163.2,58.42 R39.2 162.56,59.05 161.29,59.05 161.29,61.59 153.04,69.85 146.69,69.85 145.42,71.12 Q21.2
N$44  (via drill 0.61)
  Top 0.381: v140.34,28.57 140.34,43.81 143.51,46.99 143.51,71.75 142.24,73.03 Q21.3 | v22.23,17.78 13.97,26.04 EDGE.AJ1
  Bottom 0.381: v140.34,28.57 133.35,21.59 82.55,21.59 80.01,19.05 67.31,19.05 64.77,16.51 41.91,16.51 40.64,17.78 v22.23,17.78
N$45
  Top 0.381: 175.26,43.18 R33.1 | 175.26,43.18 C16.1 | E2.11 175.26,43.18
N$46
  Bottom 0.381: C16.2 182.25,43.18 179.71,45.72 R34.1 165.74,45.72 163.2,43.18 R33.2 161.93,43.18 153.04,52.07 146.69,52.07 145.42,53.34 Q18.2
N$47  (via drill 0.61)
  Top 0.381: v29.21,22.23 29.21,5.08 115.57,5.08 127,16.51 127,43.18 D51.C
  Bottom 0.381: D51.C 130.18,46.35 130.18,54.61 140.34,54.61 141.61,55.88 Q18.3 | v29.21,22.23 26.04,25.4 13.97,25.4 EDGE.AJ2
N$48
  Top 0.381: E9.11 175.26,118.11 176.53,116.84 176.53,70.48 177.8,69.22 C21.1
  Bottom 0.381: C21.1 R43.1
N$49
  Bottom 0.381: C21.2 182.25,68.58 179.71,71.12 R44.1 172.09,71.12 170.82,69.85 164.47,69.85 163.2,68.58 R43.2 161.93,68.58 158.12,72.39 136.53,72.39 135.26,71.12 Q20.2
N$50  (via drill 0.61)
  Top 0.381: v90.17,72.39 82.55,64.77 v82.55,24.13 | v19.05,19.05 13.97,24.13 EDGE.AH1
  Bottom 0.381: v90.17,72.39 130.18,72.39 131.45,73.66 Q20.3 | v82.55,24.13 80.01,21.59 67.31,21.59 64.77,19.05 v19.05,19.05
N$51  (via drill 0.61)
  Top 0.381: v165.1,63.5 165.1,115.57 167.64,118.11 E9.8
  Bottom 0.381: C20.1 R41.1 v165.1,63.5
N$52
  Bottom 0.381: C20.2 182.25,63.5 179.71,66.04 R42.1 165.74,66.04 163.2,63.5 R41.2 161.93,63.5 154.94,70.48 Q22.2
N$53  (via drill 0.61)
  Top 0.381: D52.C 151.13,52.07 151.13,71.75 152.4,73.03 Q22.3 | v20.32,24.13 23.5,27.3 23.5,59.05 v32.39,67.94
  Bottom 0.381: v20.32,24.13 13.97,24.13 EDGE.AH2 | v32.39,67.94 36.83,72.39 64.77,72.39 67.31,69.85 131.45,69.85 136.53,74.93 150.5,74.93 151.77,73.66 Q22.3
N$54
  Top 0.381: 173.99,38.1 R31.1 | 173.99,38.1 C15.1 | 173.99,38.1 173.99,31.75 172.09,31.75 168.91,34.92 168.91,93.98 170.18,95.25 E2.6
N$55
  Bottom 0.381: Q14.2 135.26,35.56 136.53,36.83 160.66,36.83 161.93,38.1 R31.2 169.55,38.1 172.09,40.64 R32.1 179.71,40.64 182.25,38.1 C15.2
N$56
  Top 0.381: D48.C 128.27,24.13 128.27,16.51 115.57,3.81 18.42,3.81 18.42,9.53 17.78,10.16 17.78,12.7 13.97,16.51 EDGE.AE1
  Bottom 0.381: D48.C 129.54,38.1 Q14.3
N$57  (via drill 0.61)
  Top 0.381: R23.1 C11.1 177.8,19.68 191.77,33.66 v191.77,113.67
  Bottom 0.381: v191.77,113.67 172.09,113.67 E5.6
N$58
  Bottom 0.381: Q13.2 R23.2 163.2,17.78 165.74,20.32 R24.1 179.71,20.32 182.25,17.78 C11.2
N$59
  Top 0.381: D46.C 151.13,11.43 151.13,18.41 152.4,19.68 Q13.3
  Bottom 0.381: D46.C 149.23,9.53 149.23,13.97 41.91,13.97 41.28,13.34 13.97,13.34 EDGE.AD2
N$60  (via drill 0.61)
  Top 0.381: v171.45,90.81 171.45,34.92 172.72,33.66 R29.1
  Bottom 0.381: R29.1 C14.1 | v171.45,90.81 172.09,90.81 E2.3
N$61
  Bottom 0.381: Q16.2 159.39,35.56 161.93,33.02 R29.2 163.2,33.02 165.74,35.56 R30.1 179.71,35.56 182.25,33.02 C14.2
N$62  (via drill 0.61)
  Top 0.381: Q16.3 152.4,37.47 151.13,36.2 151.13,29.21 D49.C 146.05,24.13 v146.05,12.7 | v23.5,8.89 20.32,12.06 v20.32,14.61
  Bottom 0.381: v146.05,12.7 144.78,11.43 133.35,11.43 130.81,8.89 v23.5,8.89 | v20.32,14.61 19.05,15.88 13.97,15.88 EDGE.AE2
N$63
  Top 0.381: C10.1 R21.1
  Bottom 0.381: E5.3 182.88,106.68 188.6,106.68 190.5,104.78 190.5,11.43 179.71,11.43 178.44,12.7 C10.1
N$64
  Bottom 0.381: C10.2 182.25,12.7 179.71,15.24 R22.1 165.74,15.24 163.2,12.7 R21.2 161.93,12.7 158.12,16.51 146.69,16.51 145.42,17.78 Q12.2
N$65
  Top 0.381: Q12.3 142.24,19.68 143.51,18.41 143.51,6.35 138.43,6.35 137.8,6.99 137.8,9.53 D47.C 135.89,10.16 127,1.27 17.15,1.27 17.15,2.54 15.88,3.81 13.97,3.81 EDGE.AA1
N$66  (via drill 0.61)
  Top 0.381: E2.5 v172.72,100.97
  Bottom 0.381: E2.5 173.36,95.89 174.63,95.89 E2.4 | v172.72,100.97 142.88,100.97 E4.13
N$67
  Bottom 0.381: E4.2 142.24,109.22 170.18,109.22 E5.5 173.36,111.12 174.63,111.12 E5.4
N$68  (via drill 0.61)
  Top 0.381: E5.2 180.98,111.12 182.25,111.12 E5.1 | v190.5,107.95 190.5,128.91 189.23,130.18 95.25,130.18 95.25,125.73 v93.98,124.46 | v15.24,127 13.97,127 EDGE.BV1
  Bottom 0.381: v190.5,107.95 186.69,107.95 E5.1 | v93.98,124.46 73.66,124.46 72.39,125.73 72.39,130.18 25.4,130.18 22.23,127 v15.24,127
N$69  (via drill 0.61)
  Top 0.381: E2.2 180.98,95.89 182.25,95.89 E2.1 | v135.89,102.23 135.89,109.22 137.16,110.49 E4.3
  Bottom 0.381: v135.89,102.23 139.07,99.06 168.91,99.06 169.55,99.69 179.71,99.69 E2.1
N$70  (via drill 0.61)
  Top 0.381: E4.4 133.99,111.12 132.72,111.12 E4.5 120.02,99.69 114.3,99.69 114.3,95.25 v109.22,90.17 | v25.4,87.63 25.4,114.94 26.67,116.2 v26.67,120.65
  Bottom 0.381: v109.22,90.17 106.68,87.63 v25.4,87.63 | v26.67,120.65 15.88,120.65 14.61,119.38 13.97,119.38 EDGE.BS2
N$71  (via drill 0.61)
  Top 0.381: E4.6 128.91,111.12 127.64,111.12 E4.7 126.37,111.12 113.03,111.12 113.03,97.79 v109.22,93.98 | v29.85,113.67 v49.53,93.98
  Bottom 0.381: v49.53,93.98 v109.22,93.98 | v29.85,113.67 29.21,114.3 13.97,114.3 EDGE.BR2
N$72  (via drill 0.61)
  Top 0.381: v130.81,85.72 130.81,99.06 134.62,102.87 E4.11 | v80.01,86.36 77.47,88.9 v77.47,104.14
  Bottom 0.381: E4.11 135.26,103.5 136.53,103.5 E4.12 | v130.81,85.72 83.82,85.72 83.19,86.36 v80.01,86.36 | v77.47,104.14 72.39,109.22 16.51,109.22 14.61,111.12 13.97,111.12 EDGE.BP2
N$73
  Bottom 0.381: D27.C 80.01,53.34 82.55,55.88 D26.A
N$74  (via drill 0.61)
  Top 0.381: v106.68,101.6 107.95,100.33 107.95,66.04 | 107.95,66.04 107.95,57.78 114.3,51.44 R17.1 Q8.3 | v102.24,66.04 107.95,66.04
  Bottom 0.381: v106.68,101.6 96.52,101.6 E3.9 | 27.94,54.61 26.67,53.34 13.97,53.34 13.34,52.7 EDGE.AT2 | 27.94,54.61 31.12,57.78 34.93,57.78 D28.A | v102.24,66.04 95.25,66.04 95.25,65.41 92.08,65.41 91.44,64.77 84.46,64.77 79.38,59.69 77.47,59.69 74.93,57.15 57.79,57.15 56.52,55.88 54.61,55.88 53.34,57.15 44.45,57.15 41.91,54.61 27.94,54.61
N$75  (via drill 0.61)
  Top 0.381: v111.76,59.69 111.76,55.88 R47.1
  Bottom 0.381: D31.A 89.54,62.87 93.98,62.87 94.62,62.23 100.97,62.23 102.24,60.96 Q10.2 110.49,60.96 v111.76,59.69
N$76
  Bottom 0.381: D30A.C 80.01,66.04 82.55,68.58 D29.A
N$77
  Bottom 0.381: D31.C 80.01,63.5 82.55,66.04 D30A.A
N$78  (via drill 0.61)
  Top 0.381: v29.21,50.16 29.21,50.8 34.29,55.88 D32.A | E3.11 99.06,89.53 99.7,89.53 v99.7,82.55 99.7,73.66 101.6,71.75 101.6,67.31 100.97,66.67 100.97,62.23 102.24,60.96 102.24,59.69 103.51,58.42 Q10.3 | v60.33,60.33 v60.33,82.55
  Bottom 0.381: v29.21,50.16 28.58,49.53 13.97,49.53 EDGE.AS2 | Q10.3 R19.1 | v60.33,60.33 54.61,60.33 53.98,59.69 44.45,59.69 41.91,57.15 36.2,57.15 36.2,56.52 D32.A | v60.33,82.55 v99.7,82.55
N$79
  Top 0.381: Q2.2 R48.1
  Bottom 0.381: D35.A 89.54,18.41 89.54,19.05 101.6,19.05 102.24,19.68 104.14,19.68 Q2.2
N$80
  Bottom 0.381: D34.C 80.01,20.32 82.55,22.86 D33.A
N$81
  Bottom 0.381: D35.C 80.01,17.78 82.55,20.32 D34.A
N$82
  Top 0.381: D36.A 36.83,48.26 36.83,36.83 39.37,34.29 39.37,33.02 40.64,31.75 E10.3 40.64,27.94 35.56,22.86 35.56,6.35 38.74,6.35 38.74,6.99 88.9,6.99 99.06,17.14 99.06,17.78 Q2.3 R11.1
N$83
  Bottom 0.381: 91.44,29.21 92.71,30.48 Q3.2 | 91.44,29.21 90.17,27.94 D39.A | 91.44,29.21 112.4,29.21 113.67,30.48 R49.1
N$84
  Bottom 0.381: D38.C 80.01,30.48 82.55,33.02 D37.A
N$85
  Bottom 0.381: D39.C 80.01,27.94 82.55,30.48 D38.A
N$86  (via drill 0.61)
  Top 0.381: D40.A 33.66,48.9 33.66,33.66 35.56,31.75 E10.1 v38.1,33.02
  Bottom 0.381: R14.1 113.67,33.02 112.4,34.29 98.43,34.29 97.16,33.02 Q3.3 95.89,33.02 94.62,34.29 81.92,34.29 79.38,36.83 57.79,36.83 53.98,33.02 v38.1,33.02
N$87  (via drill 0.61)
  Top 0.381: v39.37,40.01 39.37,35.56 43.18,31.75 E10.4
  Bottom 0.381: v39.37,40.01 13.97,40.01 EDGE.AN2
N$88  (via drill 0.61)
  Top 0.381: v36.2,102.87 26.67,93.34 26.67,84.45 v19.69,77.47 | v15.24,77.47 13.97,77.47 EDGE.BB1
  Bottom 0.381: v36.2,102.87 90.17,102.87 E3.8 | v15.24,77.47 v19.69,77.47
N$89  (via drill 0.61)
  Top 0.381: v15.24,74.93 13.97,74.93 EDGE.BA1 | v96.52,76.2 E3.10
  Bottom 0.381: v96.52,76.2 95.25,74.93 67.31,74.93 64.77,77.47 44.45,77.47 41.28,74.3 20.96,74.3 20.32,74.93 v15.24,74.93
N$90
  Bottom 0.381: E10.2 33.66,34.92 13.97,34.92 EDGE.AM2
N$91  (via drill 0.61)
  Top 0.381: v34.93,121.28 26.67,113.03 v26.67,104.14 | v15.24,104.14 13.97,102.87 EDGE.BL1
  Bottom 0.381: v34.93,121.28 49.53,121.28 52.07,123.83 69.85,123.83 69.85,128.27 69.22,128.91 67.95,128.91 E6.5 | v15.24,104.14 v26.67,104.14
N$92  (via drill 0.61)
  Top 0.381: v59.69,113.67 v59.69,125.09 | v18.42,111.76 16.51,109.86 16.51,102.23 13.97,99.69 EDGE.BK1
  Bottom 0.381: v59.69,125.09 66.68,125.09 E6.4 | v59.69,113.67 57.79,111.76 v18.42,111.76
N$93  (via drill 0.61)
  Top 0.381: v69.85,107.95 69.85,124.46 71.12,125.73 E6.3 | v15.24,105.41 13.97,105.41 EDGE.BM1
  Bottom 0.381: v69.85,107.95 67.31,105.41 v15.24,105.41
N$94  (via drill 0.61)
  Top 0.381: v63.5,90.17 73.66,100.33 E6.13 | v15.24,90.81 13.97,90.81 EDGE.BF1
  Bottom 0.381: v63.5,90.17 29.21,90.17 28.58,90.81 v15.24,90.81
N$95  (via drill 0.61)
  Top 0.381: v57.15,116.2 52.07,111.12 v52.07,97.79 | v17.15,96.52 13.97,93.34 EDGE.BH1
  Bottom 0.381: v57.15,116.2 67.95,116.2 E6.12 | v52.07,97.79 50.8,96.52 v17.15,96.52
N$96  (via drill 0.61)
  Top 0.381: v23.5,101.6 23.5,119.38 30.48,126.36 30.48,128.91 61.6,128.91 62.23,128.27 62.23,125.73 E6.11 | v17.78,100.33 13.97,96.52 EDGE.BJ1
  Bottom 0.381: v23.5,101.6 22.23,100.33 v17.78,100.33
N$97  (via drill 0.61)
  Top 0.381: v50.8,99.06 36.83,113.03 v36.83,123.19 | v16.51,119.38 13.97,119.38 EDGE.BS1
  Bottom 0.381: v50.8,99.06 88.27,99.06 89.54,100.33 129.54,100.33 132.08,97.79 E1.5 | v36.83,123.19 31.12,123.19 27.31,119.38 v16.51,119.38
N$98  (via drill 0.61)
  Top 0.381: v113.67,92.71 116.21,95.25 116.21,98.42 127.64,98.42 E1.6 | v28.58,113.03 v48.9,92.71 | v15.88,113.03 13.97,114.94 EDGE.BR1
  Bottom 0.381: v48.9,92.71 v113.67,92.71 | v15.88,113.03 v28.58,113.03
N$99  (via drill 0.61)
  Top 0.381: v18.42,115.57 17.15,114.3 17.15,112.39 16.51,111.76 13.97,111.76 EDGE.BP1 | v138.43,121.28 138.43,101.6 134.62,97.79 E1.4
  Bottom 0.381: v18.42,115.57 23.5,115.57 24.77,116.84 R51.1 26.04,116.84 29.21,120.02 58.42,120.02 60.96,122.56 137.16,122.56 v138.43,121.28
N$100  (via drill 0.61)
  Top 0.381: E3.6 93.98,113.03 95.25,114.3 95.25,124.46 96.52,125.73 E7.5 100.97,122.56 105.41,122.56 v105.41,80.64 | v15.24,80.01 13.97,80.01 EDGE.BC1
  Bottom 0.381: v105.41,80.64 104.78,80.01 v15.24,80.01
N$101  (via drill 0.61)
  Top 0.381: v93.98,108.58 93.98,109.22 E3.5 | v81.28,83.82 v81.28,108.58 | v15.24,83.19 13.97,83.19 EDGE.BD1
  Bottom 0.381: v81.28,108.58 v93.98,108.58 | v81.28,83.82 20.96,83.82 20.32,83.19 v15.24,83.19
N$102  (via drill 0.61)
  Top 0.381: v15.24,58.42 13.97,58.42 EDGE.AV1 | v104.14,68.58 E3.13
  Bottom 0.381: v104.14,68.58 102.87,67.31 82.55,67.31 80.01,64.77 67.31,64.77 64.77,62.23 22.86,62.23 19.05,58.42 v15.24,58.42
N$103  (via drill 0.61)
  Top 0.381: v100.33,91.44 100.33,101.6 101.6,102.87 E3.12 | v18.42,93.34 17.15,92.08 17.15,65.41 20.32,62.23 20.32,59.69 16.51,55.88 13.97,55.88 EDGE.AU1
  Bottom 0.381: v100.33,91.44 30.48,91.44 28.58,93.34 v18.42,93.34
N$104  (via drill 0.61)
  Top 0.381: v22.86,129.54 22.86,130.81 90.17,130.81 E7.6
  Bottom 0.381: v22.86,129.54 21.59,128.27 13.97,128.27 EDGE.BV2
N$105
  Bottom 0.381: D24.C 64.77,76.2 67.31,73.66 D23.A
N$107
  Bottom 0.381: D41.C 41.91,53.34 44.45,55.88 D42.A
N$108
  Bottom 0.381: D42.C 41.91,55.88 44.45,58.42 D43.A
N$109
  Bottom 0.381: D43.C 41.91,58.42 44.45,60.96 D44.A
N$110
  Bottom 0.381: D22.C 64.77,71.12 67.31,68.58 D21.A
VCC  (via drill 0.61)
  Top 0.635: R50.2 40.01,63.5 38.74,62.23 38.74,56.52 27.94,45.72 v27.94,37.47 27.94,17.78 C23.+ 24.77,14.61 24.77,6.35 v23.5,5.08 | R20.2 R19.2 R47.2 R18.2 R17.2 R46.2 R16.2 R15.2 R14.2 R49.2 R13.2 R12.2 R48.2 R11.2 | E9.14 182.88,118.11 184.15,116.84 184.15,106.68 182.88,105.41 E5.14 | 146.05,103.5 147.32,104.78 C4.1 | 146.05,103.5 146.05,92.08 147.32,90.81 C1.1 | 146.05,103.5 146.05,118.75 147.32,120.02 C8.1 | E7.14 106.68,118.11 107.95,116.84 107.95,106.68 106.68,105.41 E3.14 | v137.16,67.31 140.97,71.12 140.97,86.36 142.24,87.63 E1.14 | C29.1 55.88,37.47 58.42,40.01 58.42,95.89 60.96,98.42 E6.8
  Bottom 0.635: C29.1 55.88,36.2 37.47,36.2 E10.14 34.93,37.47 v27.94,37.47 | R50.2 40.01,63.5 36.83,66.67 27.31,66.67 C25.+ 20.32,73.66 13.97,73.66 EDGE.BA2 | v23.5,5.08 13.97,5.08 EDGE.AA2 | R51.2 36.2,116.84 38.1,118.75 60.33,118.75 E6.8 62.87,121.28 80.01,121.28 80.65,120.65 C6.1 81.92,120.65 82.55,121.28 111.76,121.28 C7.1 | E9.14 184.15,120.65 C9.1 | E2.14 184.15,90.17 C2.1 187.96,93.98 188.6,93.98 189.23,94.61 189.23,104.78 187.96,104.78 C5.1 184.15,105.41 E5.14 180.98,106.05 147.32,106.05 | E7.14 107.95,120.65 C7.1 | E8.8 125.73,120.65 C7.1 | E3.14 107.95,105.41 C3.1 125.73,105.41 E4.8 128.91,106.05 147.32,106.05 | E1.14 143.51,90.17 C1.1 | C4.1 147.32,106.05 | v137.16,67.31 128.91,67.31 125.1,63.5 R20.2

## Text on the board
Bottom: VRS | M7103 NEGATIVE I/O BUS CONVERTER